# EAGLE board The Extender PCB (EAGLE 9.5.0)
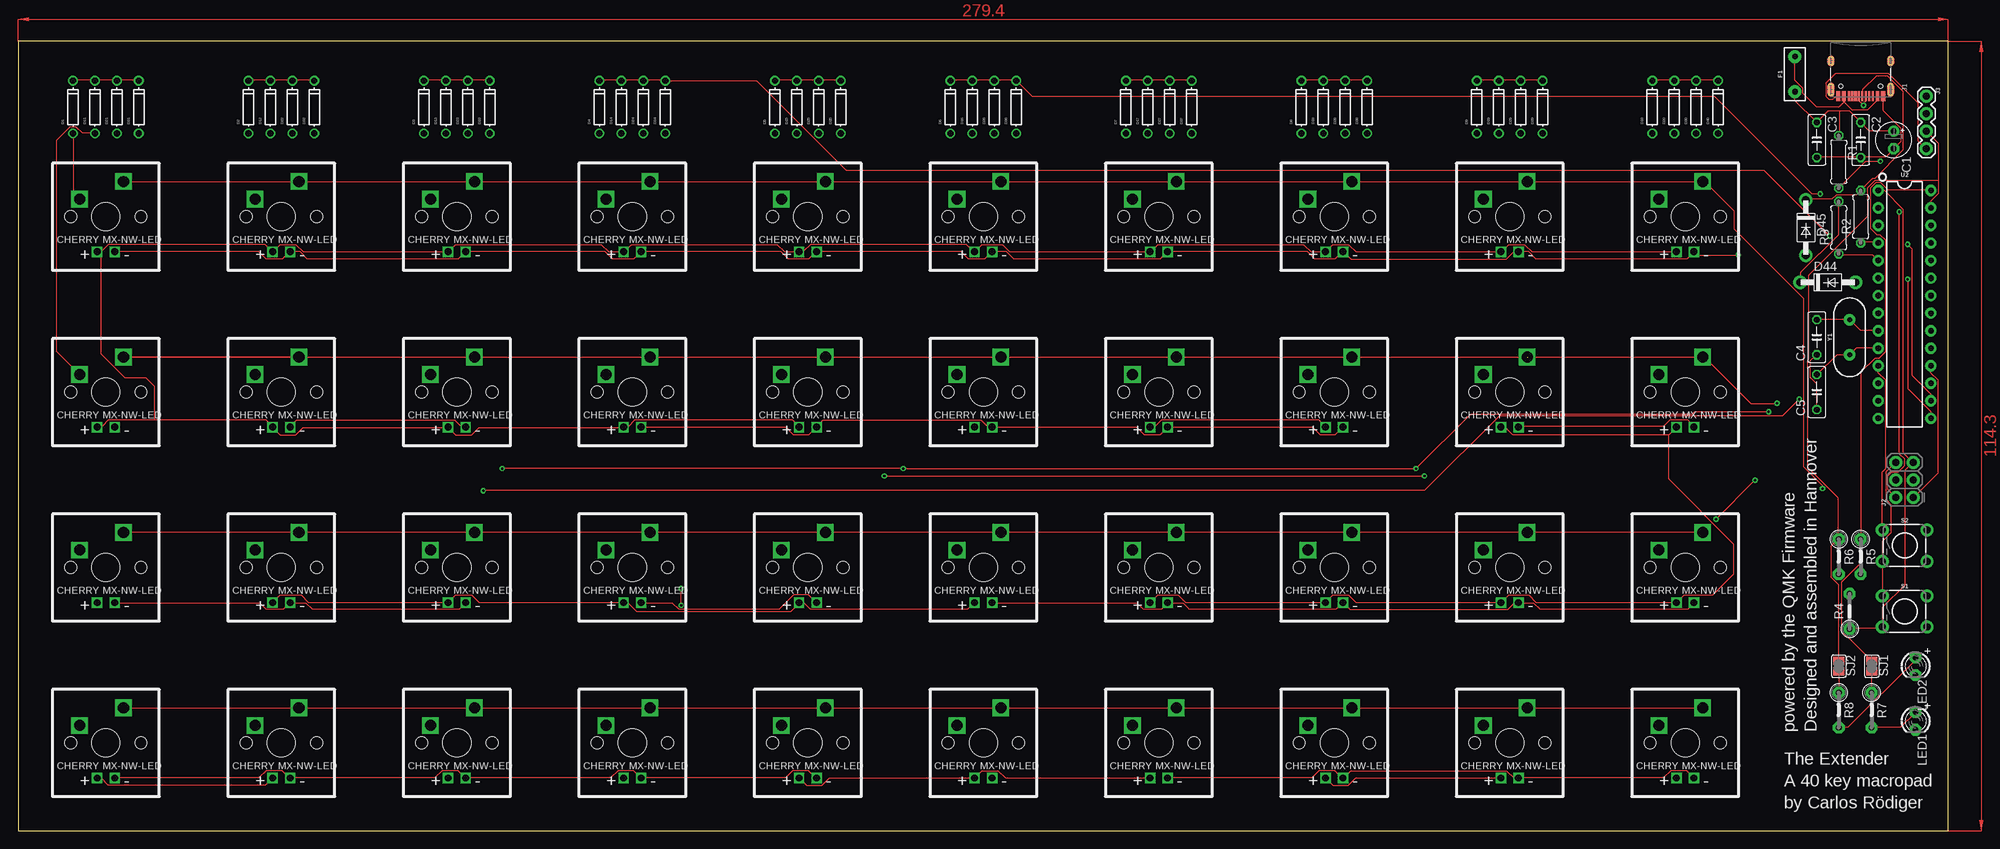
[diagram p0: board, top side]
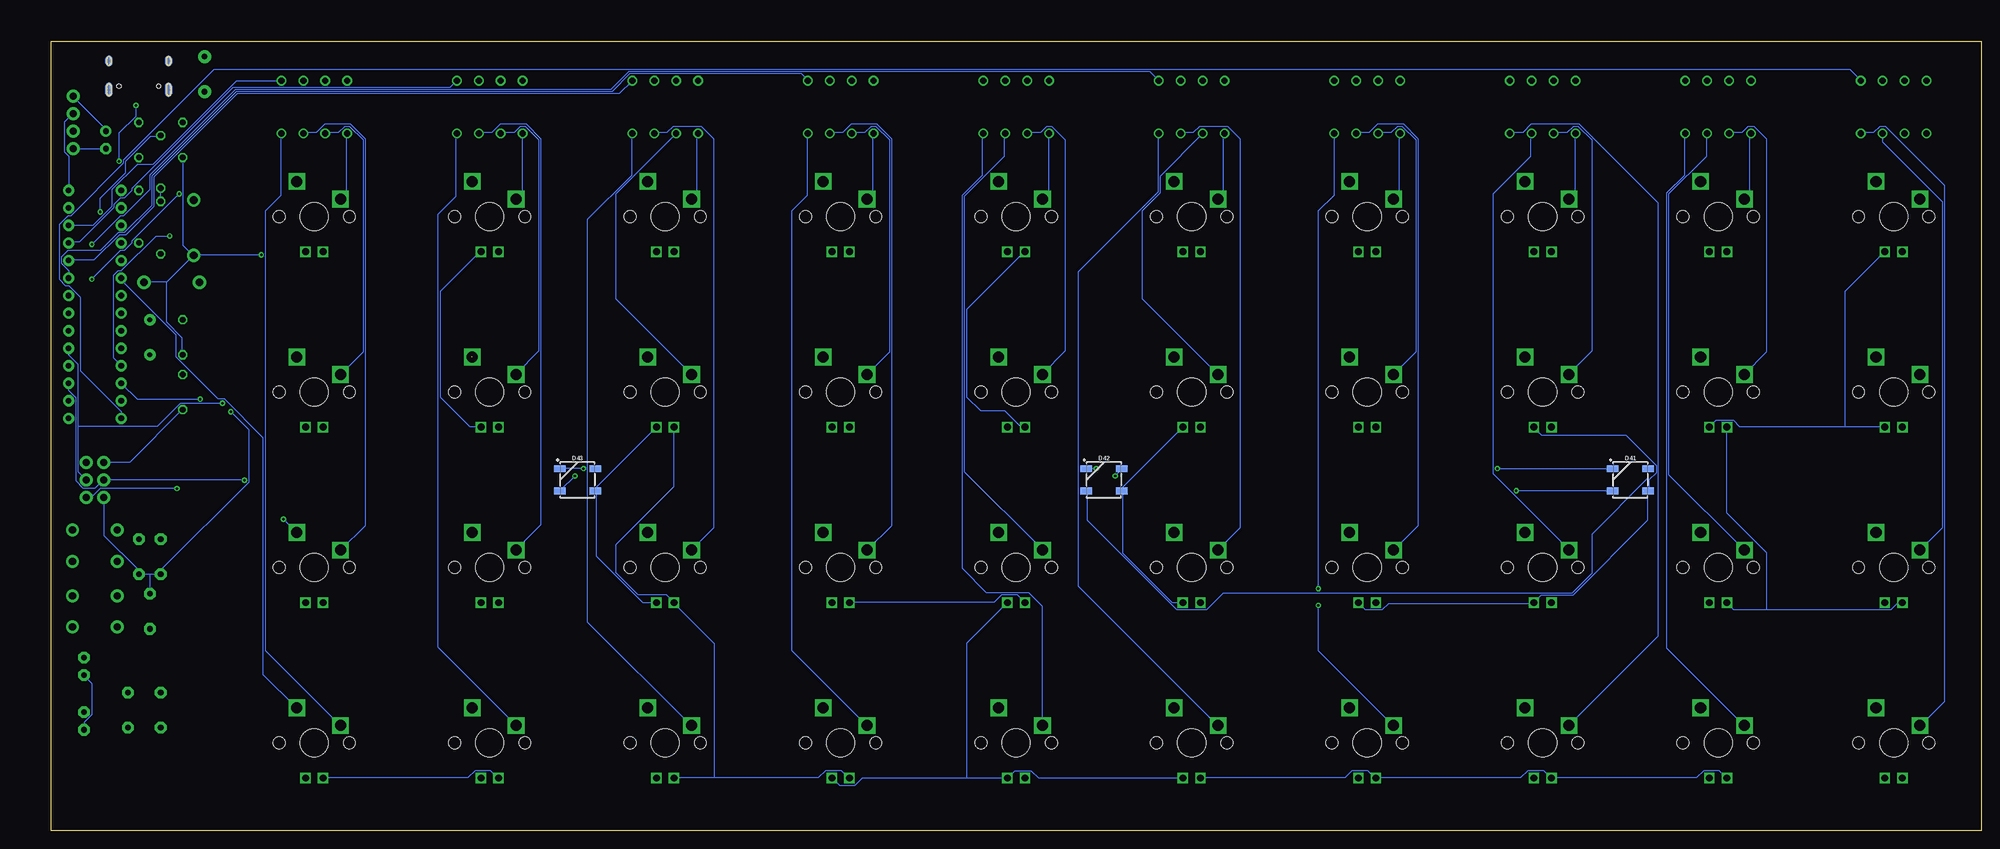
[diagram p1: board, bottom side, seen from below]

Size 279.4 x 114.3 mm. Coordinates in mm from the lower left corner, seen from the top.
Outline: 0,0 279.4,0 279.4,114.3 0,114.3 0,0
Copper layers (1*16): Top 0.035mm / dielectric 1.5mm / Bottom 0.035mm
Design rules "default": minimum track width 6mil, minimum drill 0.35mm, track to track 6mil, track to pad 6mil, pad to pad 6mil, via to via 6mil, smd to smd 6mil, copper to edge 40mil, drill to drill 6mil, minimum pad ring 10mil, minimum via ring 8mil, stop-mask expansion 4mil, vias tented up to drill 0mil, thermal gap 10mil

## Footprints (pad centres in the part's own frame; a part is rotated, then mirrored left to right if it is on the bottom)
E2,5-5 = drill 0.813 pad 1.6: + -1.27,0 | drill 0.813 pad 1.6 octagon: - 1.27,0
C050-025X075 = drill 0.813 octagon: 1 -2.54,0; 2 2.54,0
DO-1N4148 = drill 0.9: A -3.81,0; C 3.81,0
WS2812B = smd 1.651 x 1: 1 2.577,-1.6; 2 2.577,1.6; 3 -2.577,1.6; 4 -2.577,-1.6
DO41-7 = drill 1.118 pad 1.93: A 4,0; C -4,0
PTH = drill 0.8 pad 1.88: P$1 -2.54,0; P$2 2.54,0
USB-C-16P = smd 0.3 x 1.45: A5 -1.25,0; A6 -0.25,0; A7 0.25,0; A8 1.25,0; B5 1.75,0; B6 0.75,0; B7 -0.75,0; B8 -1.75,0 | smd 0.6 x 1.45: GND -3.225,0; GND2 3.225,0 | smd 1 x 2.1: SHLD1 -4.32,-0.915; SHLD2 4.32,-0.915 | smd 1 x 2.1 bottom: SHLD3 -4.32,-0.915; SHLD4 4.32,-0.915 | smd 1 x 1.6: SHLD5 -4.32,-5.095; SHLD8 4.32,-5.095 | smd 1 x 1.6 bottom: SHLD6 -4.32,-5.095; SHLD7 4.32,-5.095 | smd 0.55 x 1.45: VBUS1 -2.45,0; VBUS2 2.45,0 | hole 0.65: -2.89,-1.445; 2.89,-1.445
2X3-NS = drill 1.016 pad 1.88: 1 -2.54,-1.27; 2 -2.54,1.27; 3 0,-1.27; 4 0,1.27; 5 2.54,-1.27; 6 2.54,1.27
1X04 = drill 1.016 pad 1.88: 1 0,0; 2 2.54,0; 3 5.08,0; 4 7.62,0
LED3MM = drill 0.813 pad 1.676 octagon: A -1.27,0; K 1.27,0
0207/7 = drill 0.813 octagon: 1 -3.81,0; 2 3.81,0
0207/5V = drill 0.813 pad 1.676 octagon: 1 -2.54,0; 2 2.54,0
TACTILE_SWITCH_PTH_6.0MM = drill 1.016 pad 1.88: 1 -3.251,2.261; 2 3.251,2.261; 3 -3.251,-2.261; 4 3.251,-2.261
SJ = smd 1.168 x 1.6: 1 -0.762,0; 2 0.762,0
DIP28 = drill 0.813 pad 1.626: 1 -16.51,-3.81; 2 -13.97,-3.81; 3 -11.43,-3.81; 4 -8.89,-3.81; 5 -6.35,-3.81; 6 -3.81,-3.81; 7 -1.27,-3.81; 8 1.27,-3.81; 9 3.81,-3.81; 10 6.35,-3.81; 11 8.89,-3.81; 12 11.43,-3.81; 13 13.97,-3.81; 14 16.51,-3.81; 15 16.51,3.81; 16 13.97,3.81; 17 11.43,3.81; 18 8.89,3.81; 19 6.35,3.81; 20 3.81,3.81; 21 1.27,3.81; 22 -1.27,3.81; 23 -3.81,3.81; 24 -6.35,3.81; 25 -8.89,3.81; 26 -11.43,3.81; 27 -13.97,3.81; 28 -16.51,3.81
CHERRYMX-NN-LED = drill 1 square: LED+ -1.27,-5.08; LED- 1.27,-5.08 | drill 1.6 square: SIDE -3.81,2.54; UP 2.54,5.08 | hole 1.753: -5.08,0; 5.08,0 | hole 4.089: 0,0
HC49US = drill 0.7 pad 1.651: 1 -2.54,0; 2 2.54,0

## Placement (x,y rotation side)
C1  4.7u  [E2,5-5]  271.46,100.01 270 top
C2  100n  [C050-025X075]  266.7,100.01 270 top
C3  100n  [C050-025X075]  260.35,100.01 270 top
C4  20p  [C050-025X075]  260.35,71.44 90 top
C5  20p  [C050-025X075]  260.35,63.5 90 top
D1  [DO-1N4148]  7.94,104.78 90 top
D2  [DO-1N4148]  33.34,104.78 90 top
D3  [DO-1N4148]  58.74,104.78 90 top
D4  [DO-1N4148]  84.14,104.78 90 top
D5  [DO-1N4148]  109.54,104.78 90 top
D6  [DO-1N4148]  134.94,104.78 90 top
D7  [DO-1N4148]  160.34,104.78 90 top
D8  [DO-1N4148]  185.74,104.78 90 top
D9  [DO-1N4148]  211.14,104.78 90 top
D10  [DO-1N4148]  236.54,104.78 90 top
D11  [DO-1N4148]  11.11,104.78 90 top
D12  [DO-1N4148]  36.51,104.78 90 top
D13  [DO-1N4148]  61.91,104.78 90 top
D14  [DO-1N4148]  87.31,104.78 90 top
D15  [DO-1N4148]  112.71,104.78 90 top
D16  [DO-1N4148]  138.11,104.78 90 top
D17  [DO-1N4148]  163.51,104.78 90 top
D18  [DO-1N4148]  188.91,104.78 90 top
D19  [DO-1N4148]  214.31,104.78 90 top
D20  [DO-1N4148]  239.71,104.78 90 top
D21  [DO-1N4148]  14.29,104.78 90 top
D22  [DO-1N4148]  39.69,104.78 90 top
D23  [DO-1N4148]  65.09,104.78 90 top
D24  [DO-1N4148]  90.49,104.78 90 top
D25  [DO-1N4148]  115.89,104.78 90 top
D26  [DO-1N4148]  141.29,104.78 90 top
D27  [DO-1N4148]  166.69,104.78 90 top
D28  [DO-1N4148]  192.09,104.78 90 top
D29  [DO-1N4148]  217.49,104.78 90 top
D30  [DO-1N4148]  242.89,104.78 90 top
D31  [DO-1N4148]  17.46,104.78 90 top
D32  [DO-1N4148]  42.86,104.78 90 top
D33  [DO-1N4148]  68.26,104.78 90 top
D34  [DO-1N4148]  93.66,104.78 90 top
D35  [DO-1N4148]  119.06,104.78 90 top
D36  [DO-1N4148]  144.46,104.78 90 top
D37  [DO-1N4148]  169.86,104.78 90 top
D38  [DO-1N4148]  195.26,104.78 90 top
D39  [DO-1N4148]  220.66,104.78 90 top
D40  [DO-1N4148]  246.06,104.78 90 top
D41  WS2812B  [WS2812B]  50.8,50.8 0 bottom
D42  WS2812B  [WS2812B]  127,50.8 0 bottom
D43  WS2812B  [WS2812B]  203.2,50.8 0 bottom
D44  3.6V  [DO41-7]  261.94,79.38 0 top
D45  3.6V  [DO41-7]  258.76,87.31 270 top
F1  72V/0.25A  [PTH]  257.18,109.54 90 top
J1  [USB-C-16P]  266.7,106.36 180 top
J2  AVR_SPI_PROG_3X2NS  [2X3-NS]  273.05,50.8 90 top
J3  [1X04]  276.23,106.36 270 top
LED1  [LED3MM]  274.64,15.88 270 top
LED2  [LED3MM]  274.64,23.81 270 top
R1  1.5k  [0207/7]  263.52,96.84 270 top
R2  75R  [0207/7]  266.7,88.9 90 top
R3  75R  [0207/7]  263.52,87.31 90 top
R4  10k  [0207/5V]  265.11,31.75 90 top
R5  I2C  [0207/5V]  266.7,39.69 270 top
R6  I2C  [0207/5V]  263.52,39.69 270 top
R7  [0207/5V]  268.29,17.46 270 top
R8  [0207/5V]  263.52,17.46 270 top
S1  MOMENTARY-SWITCH-SPST-PTH-6.0MM  [TACTILE_SWITCH_PTH_6.0MM]  273.05,31.75 0 top
S2  MOMENTARY-SWITCH-SPST-PTH-6.0MM  [TACTILE_SWITCH_PTH_6.0MM]  273.05,41.27 0 top
SJ1  [SJ]  268.29,23.81 270 top
SJ2  [SJ]  263.52,23.81 270 top
U2  328P  [DIP28]  273.05,76.2 270 top
U$1  CHERRY-MX1A-E1NW-LED  [CHERRYMX-NN-LED]  12.7,88.9 0 top
U$2  CHERRY-MX1A-E1NW-LED  [CHERRYMX-NN-LED]  38.1,88.9 0 top
U$3  CHERRY-MX1A-E1NW-LED  [CHERRYMX-NN-LED]  63.5,88.9 0 top
U$4  CHERRY-MX1A-E1NW-LED  [CHERRYMX-NN-LED]  88.9,88.9 0 top
U$5  CHERRY-MX1A-E1NW-LED  [CHERRYMX-NN-LED]  114.3,88.9 0 top
U$6  CHERRY-MX1A-E1NW-LED  [CHERRYMX-NN-LED]  139.7,88.9 0 top
U$7  CHERRY-MX1A-E1NW-LED  [CHERRYMX-NN-LED]  165.1,88.9 0 top
U$8  CHERRY-MX1A-E1NW-LED  [CHERRYMX-NN-LED]  190.5,88.9 0 top
U$9  CHERRY-MX1A-E1NW-LED  [CHERRYMX-NN-LED]  215.9,88.9 0 top
U$10  CHERRY-MX1A-E1NW-LED  [CHERRYMX-NN-LED]  241.3,88.9 0 top
U$11  CHERRY-MX1A-E1NW-LED  [CHERRYMX-NN-LED]  12.7,63.5 0 top
U$12  CHERRY-MX1A-E1NW-LED  [CHERRYMX-NN-LED]  38.1,63.5 0 top
U$13  CHERRY-MX1A-E1NW-LED  [CHERRYMX-NN-LED]  63.5,63.5 0 top
U$14  CHERRY-MX1A-E1NW-LED  [CHERRYMX-NN-LED]  88.9,63.5 0 top
U$15  CHERRY-MX1A-E1NW-LED  [CHERRYMX-NN-LED]  114.3,63.5 0 top
U$16  CHERRY-MX1A-E1NW-LED  [CHERRYMX-NN-LED]  139.7,63.5 0 top
U$17  CHERRY-MX1A-E1NW-LED  [CHERRYMX-NN-LED]  165.1,63.5 0 top
U$18  CHERRY-MX1A-E1NW-LED  [CHERRYMX-NN-LED]  190.5,63.5 0 top
U$19  CHERRY-MX1A-E1NW-LED  [CHERRYMX-NN-LED]  215.9,63.5 0 top
U$20  CHERRY-MX1A-E1NW-LED  [CHERRYMX-NN-LED]  241.3,63.5 0 top
U$21  CHERRY-MX1A-E1NW-LED  [CHERRYMX-NN-LED]  12.7,38.1 0 top
U$22  CHERRY-MX1A-E1NW-LED  [CHERRYMX-NN-LED]  38.1,38.1 0 top
U$23  CHERRY-MX1A-E1NW-LED  [CHERRYMX-NN-LED]  63.5,38.1 0 top
U$24  CHERRY-MX1A-E1NW-LED  [CHERRYMX-NN-LED]  88.9,38.1 0 top
U$25  CHERRY-MX1A-E1NW-LED  [CHERRYMX-NN-LED]  114.3,38.1 0 top
U$26  CHERRY-MX1A-E1NW-LED  [CHERRYMX-NN-LED]  139.7,38.1 0 top
U$27  CHERRY-MX1A-E1NW-LED  [CHERRYMX-NN-LED]  165.1,38.1 0 top
U$28  CHERRY-MX1A-E1NW-LED  [CHERRYMX-NN-LED]  190.5,38.1 0 top
U$29  CHERRY-MX1A-E1NW-LED  [CHERRYMX-NN-LED]  215.9,38.1 0 top
U$30  CHERRY-MX1A-E1NW-LED  [CHERRYMX-NN-LED]  241.3,38.1 0 top
U$31  CHERRY-MX1A-E1NW-LED  [CHERRYMX-NN-LED]  12.7,12.7 0 top
U$32  CHERRY-MX1A-E1NW-LED  [CHERRYMX-NN-LED]  38.1,12.7 0 top
U$33  CHERRY-MX1A-E1NW-LED  [CHERRYMX-NN-LED]  63.5,12.7 0 top
U$34  CHERRY-MX1A-E1NW-LED  [CHERRYMX-NN-LED]  88.9,12.7 0 top
U$35  CHERRY-MX1A-E1NW-LED  [CHERRYMX-NN-LED]  114.3,12.7 0 top
U$36  CHERRY-MX1A-E1NW-LED  [CHERRYMX-NN-LED]  139.7,12.7 0 top
U$37  CHERRY-MX1A-E1NW-LED  [CHERRYMX-NN-LED]  165.1,12.7 0 top
U$38  CHERRY-MX1A-E1NW-LED  [CHERRYMX-NN-LED]  190.5,12.7 0 top
U$39  CHERRY-MX1A-E1NW-LED  [CHERRYMX-NN-LED]  215.9,12.7 0 top
U$40  CHERRY-MX1A-E1NW-LED  [CHERRYMX-NN-LED]  241.3,12.7 0 top
Y1  16MHz  [HC49US]  265.11,71.44 90 top

## Library data of the parts
C1-C5 D1-D40 D44 D45 LED1 LED2 R1-R8 = adafruit
D41-D43 = SparkFun-LED; PROD_ID: DIO-12503
F1 = SparkFun-Fuses; PROD_ID: RES-08490
J1 = SparkFun-Connectors; PROD_ID: CONN-14122
J2 = SparkFun-Connectors
J3 = SparkFun-Connectors; PROD_ID: CONN-09696
S1 S2 = SparkFun-Switches; PROD_ID: SWCH-08441; SF_SKU: COM-00097
SJ1 SJ2 = jumper
U2 = SparkFun-IC-Microcontroller; PROD_ID: IC-09136
U$1-U$40 = my_parts
Y1 = SparkFun-Clocks; PROD_ID: XTAL-08181; SF_ID: COM-00536

## Nets
5V: C1.+ C2.1 C3.1 D41.3 D42.3 D43.3 F1.P$1 J2.2 J3.1 R1.1 R4.2 R5.2 R6.2
COLUMN0: D1.C D11.C D21.C D31.C U2.14
COLUMN1: D2.C D12.C D22.C D32.C
COLUMN2: D3.C D13.C D23.C D33.C
COLUMN3: D4.C D14.C D24.C D34.C S2.1 U2.11
COLUMN4: D5.C D15.C D25.C D35.C U2.16
COLUMN5: D6.C D16.C D26.C D36.C U2.15
COLUMN6: D7.C D17.C D27.C D37.C U2.23
COLUMN7: D8.C D18.C D28.C D38.C U2.24
COLUMN8: D9.C D19.C D29.C D39.C U2.25
COLUMN9: D10.C D20.C D30.C D40.C U2.26
GND: C1.- C2.2 C3.2 C4.1 C5.1 D41.1 D42.1 D43.1 D44.A D45.A J1.GND J1.GND2 J2.6 J3.4 S1.1 S2.3 U$1.LED- U$2.LED- U$3.LED- U$4.LED- U$5.LED- U$6.LED- U$7.LED- U$8.LED- U$9.LED- U$10.LED- U$11.LED- U$12.LED- U$13.LED- U$14.LED- U$15.LED- U$16.LED- U$17.LED- U$18.LED- U$19.LED- U$20.LED- U$21.LED- U$22.LED- U$23.LED- U$24.LED- U$25.LED- U$26.LED- U$27.LED- U$28.LED- U$29.LED- U$30.LED- U$31.LED- U$32.LED- U$33.LED- U$34.LED- U$35.LED- U$36.LED- U$37.LED- U$38.LED- U$39.LED- U$40.LED-
I2C_SCL: J3.2 R5.1 SJ1.1 U2.28
I2C_SDA: J3.3 R6.1 SJ2.1 U2.27
LED+: U$1.LED+ U$2.LED+ U$3.LED+ U$4.LED+ U$5.LED+ U$6.LED+ U$7.LED+ U$8.LED+ U$9.LED+ U$10.LED+ U$11.LED+ U$12.LED+ U$13.LED+ U$14.LED+ U$15.LED+ U$16.LED+ U$17.LED+ U$18.LED+ U$19.LED+ U$20.LED+ U$21.LED+ U$22.LED+ U$23.LED+ U$24.LED+ U$25.LED+ U$26.LED+ U$27.LED+ U$28.LED+ U$29.LED+ U$30.LED+ U$31.LED+ U$32.LED+ U$33.LED+ U$34.LED+ U$35.LED+ U$36.LED+ U$37.LED+ U$38.LED+ U$39.LED+ U$40.LED+
N$1: D1.A U$1.SIDE
N$2: D2.A U$2.SIDE
N$3: D3.A U$3.SIDE
N$4: D4.A U$4.SIDE
N$5: D5.A U$5.SIDE
N$6: D6.A U$6.SIDE
N$7: D7.A U$7.SIDE
N$8: D8.A U$8.SIDE
N$9: D9.A U$9.SIDE
N$10: D10.A U$10.SIDE
N$11: D11.A U$11.SIDE
N$12: D12.A U$12.SIDE
N$13: D13.A U$13.SIDE
N$14: D14.A U$14.SIDE
N$15: D15.A U$15.SIDE
N$16: D16.A U$16.SIDE
N$17: D17.A U$17.SIDE
N$18: D18.A U$18.SIDE
N$19: D19.A U$19.SIDE
N$20: D20.A U$20.SIDE
N$21: D21.A U$21.SIDE
N$22: D22.A U$22.SIDE
N$23: D23.A U$23.SIDE
N$24: D24.A U$24.SIDE
N$25: D25.A U$25.SIDE
N$26: D26.A U$26.SIDE
N$27: D27.A U$27.SIDE
N$28: D28.A U$28.SIDE
N$29: D29.A U$29.SIDE
N$30: D30.A U$30.SIDE
N$31: D31.A U$31.SIDE
N$32: D32.A U$32.SIDE
N$33: D33.A U$33.SIDE
N$34: D34.A U$34.SIDE
N$35: D35.A U$35.SIDE
N$36: D36.A U$36.SIDE
N$37: D37.A U$37.SIDE
N$38: D38.A U$38.SIDE
N$39: D39.A U$39.SIDE
N$40: D40.A U$40.SIDE
N$41: D41.2 D42.4
N$42: D42.2 D43.4
N$43: F1.P$2 J1.VBUS1 J1.VBUS2
N$44: D44.C J1.A7 J1.B7 R1.2 R3.2
N$45: U2.2
N$46: D45.C J1.A6 J1.B6 R2.2
N$47: C5.2 U2.10 Y1.1
N$48: C4.2 U2.9 Y1.2
N$49: R7.1 SJ1.2
N$50: U2.3
N$51: LED1.A R7.2
N$52: R8.1 SJ2.2
N$53: LED2.A R8.2
RESET: J2.5 R4.1 S1.3 U2.1
RGB: LED1.K LED2.K
RGB_DATA: D41.4 U2.12
ROW0: J2.1 U2.18 U$1.UP U$2.UP U$3.UP U$4.UP U$5.UP U$6.UP U$7.UP U$8.UP U$9.UP U$10.UP
ROW1: J2.3 U2.19 U$11.UP U$12.UP U$13.UP U$14.UP U$15.UP U$16.UP U$17.UP U$18.UP U$19.UP U$20.UP
ROW2: J2.4 U2.17 U$21.UP U$22.UP U$23.UP U$24.UP U$25.UP U$26.UP U$27.UP U$28.UP U$29.UP U$30.UP
ROW3: U2.6 U$31.UP U$32.UP U$33.UP U$34.UP U$35.UP U$36.UP U$37.UP U$38.UP U$39.UP U$40.UP
USB_D+: R2.1 U2.4
USB_D-: R3.1 U2.5

## Tracks (layer width: path | path; a pad name or v marks a point on that pad's centre or on a via)
5V  (via drill 0.35)
  Top 0.152: C1.+ 267.97,101.28 C2.1 265.11,104.14 263.6,104.14 | 263.6,104.14 261.94,104.14 C3.1 257.18,105.73 F1.P$1 | 263.6,104.14 263.6,100.74 R1.1 | v272.29,89.61 272.29,54.56 273.05,53.8 273.05,52.88 272.14,51.97 271.22,51.97 270.61,51.36 270.61,49.38 271.68,48.31 J2.2 | v70.05,52.43 v128.12,52.43 v202.34,52.43 210.26,60.35 242.42,60.35 242.72,60.65 v253.39,60.65
  Bottom 0.152: C1.+ 271.53,101.35 271.53,101.65 276.1,106.22 J3.1 | 265.12,37.19 266.65,37.19 R5.2 266.8,37.19 266.8,37.79 271.68,42.67 271.68,48.16 J2.2 | 265.12,37.19 263.6,37.19 R6.2 263.45,37.19 263.45,37.79 250.8,50.44 250.8,58.06 v253.39,60.65 | 265.12,37.19 265.12,34.29 R4.2 | v272.29,89.61 272.29,91.59 268.63,95.25 268.63,96.93 264.97,100.58 263.6,100.58 R1.1 | v70.05,52.43 53.44,52.43 D41.3 | v128.12,52.43 129.49,52.43 D42.3 | v202.34,52.43 205.69,52.43 D43.3
COLUMN0
  Top 0.152: D1.C 8.03,108.66 11.07,108.66 D11.C 11.23,108.66 14.28,108.66 D21.C 14.43,108.66 17.32,108.66 D31.C
  Bottom 0.152: U2.14 269.24,60.65 275.18,66.6 275.18,77.27 276.86,78.94 277.32,78.94 278.23,79.86 278.23,87.78 277.01,89 276.56,89 268.94,96.62 268.94,97.08 255.83,110.19 19,110.19 17.47,108.66 D31.C
COLUMN1
  Top 0.152: D2.C 33.48,108.66 36.37,108.66 D12.C 36.53,108.66 39.57,108.66 D22.C 39.73,108.66 42.77,108.66 D32.C
COLUMN2
  Top 0.152: D3.C 58.78,108.66 61.82,108.66 D13.C 61.98,108.66 65.02,108.66 D23.C 65.18,108.66 68.22,108.66 D33.C
COLUMN3  (via drill 0.35)
  Top 0.152: D4.C 84.23,108.66 87.27,108.66 D14.C 87.43,108.66 90.48,108.66 D24.C 90.63,108.66 93.52,108.66 D34.C 93.68,108.51 106.93,108.51 119.89,95.56 252.78,95.56 v262.23,86.11 | U2.11 269.24,66.29 270.31,65.23 270.31,52.43 269.85,51.97 269.85,43.59 S2.1
  Bottom 0.152: v262.23,86.11 264.21,86.11 269.24,81.08 269.7,81.08 270.31,80.47 270.31,68.43 269.24,67.36 U2.11
COLUMN4  (via drill 0.35)
  Top 0.152: D5.C 109.68,108.66 112.57,108.66 D15.C 112.73,108.66 115.77,108.66 D25.C 115.93,108.66 118.97,108.66 D35.C | U2.16 276.86,63.25 274.12,65.99 274.12,84.28 v273.51,84.89
  Bottom 0.152: v273.51,84.89 269.39,89 268.94,89 265.12,92.81 265.12,94.94 252.78,107.29 198.37,107.29 195.78,109.88 120.34,109.88 119.13,108.66 D35.C
COLUMN5  (via drill 0.35)
  Top 0.152: D6.C 134.98,108.66 138.02,108.66 D16.C 138.18,108.66 141.22,108.66 D26.C 141.38,108.66 144.42,108.66 D36.C 144.58,108.51 146.76,106.32 245.52,106.32 259.64,92.2 v260.86,92.2 | U2.15 276.86,60.65 273.51,64.01 v273.51,79.86
  Bottom 0.152: v273.51,79.86 269.39,83.97 268.78,83.97 267.72,85.04 267.72,85.34 v260.86,92.2
COLUMN6
  Top 0.152: D7.C 160.43,108.66 163.47,108.66 D17.C 163.63,108.66 166.68,108.66 D27.C 166.83,108.66 169.72,108.66 D37.C
  Bottom 0.152: U2.23 276.86,81.08 277.93,82.14 277.93,83.06 277.01,83.97 272.29,83.97 269.7,86.56 268.78,86.56 264.82,90.53 264.82,94.79 252.63,106.99 198.22,106.99 195.63,109.58 170.79,109.58 169.88,108.66 D37.C
COLUMN7
  Top 0.152: D8.C 185.88,108.66 188.77,108.66 D18.C 188.93,108.66 191.97,108.66 D28.C 192.13,108.66 195.17,108.66 D38.C
  Bottom 0.152: U2.24 276.86,82.6 273.2,82.6 269.55,86.26 268.63,86.26 264.52,90.37 264.52,94.64 252.48,106.68 197.16,106.68 195.33,108.51 D38.C
COLUMN8
  Top 0.152: D9.C 211.18,108.66 214.22,108.66 D19.C 214.38,108.66 217.42,108.66 D29.C 217.58,108.66 220.62,108.66 D39.C
  Bottom 0.152: U2.25 276.86,85.19 275.34,85.19 270.31,90.22 270.31,90.68 269.39,91.59 268.78,91.59 267.72,92.66 267.72,92.96 253.09,107.59 221.69,107.59 220.78,108.51 D39.C
COLUMN9
  Top 0.152: D10.C 236.63,108.66 239.67,108.66 D20.C 239.83,108.66 242.88,108.66 D30.C 243.03,108.66 245.92,108.66 D40.C
  Bottom 0.152: U2.26 273.36,87.63 270.61,90.37 270.61,92.81 266.95,96.47 264.67,96.47 252.63,108.51 246.08,108.51 D40.C
GND  (via drill 0.35)
  Top 0.152: U$31.LED- 34.85,7.62 35.92,8.69 38.2,8.69 39.27,7.62 U$32.LED- 60.3,7.62 61.37,8.69 63.65,8.69 64.72,7.62 U$33.LED- 85.75,7.62 86.82,8.69 89.1,8.69 U$34.LED- 111.05,7.62 112.12,8.69 114.4,8.69 115.47,7.62 U$35.LED- | U$40.LED- 241.5,8.69 239.22,8.69 238.15,7.62 U$39.LED- 216.51,7.62 215.44,8.69 192.89,8.69 191.82,7.62 U$38.LED- 191.67,7.62 190.6,8.69 188.32,8.69 187.25,7.62 U$37.LED- | U$13.LED- 64.72,58.52 64.11,58.52 63.19,59.44 40.34,59.44 39.42,58.52 U$12.LED- | U$21.LED- 13.97,32.92 35,32.92 35.92,32 38.35,32 U$22.LED- 39.42,32.92 41.71,32.92 42.62,32 63.81,32 64.72,32.92 U$23.LED- | U$14.LED- 90.17,58.37 111.2,58.37 112.27,57.3 114.4,57.3 115.47,58.37 U$15.LED- 115.62,58.52 116.54,59.44 139.4,59.44 140.31,58.52 140.92,58.52 U$16.LED- 141.07,58.37 161.95,58.37 163.02,57.3 165.3,57.3 166.37,58.37 | U$30.LED- 242.57,32.92 241.66,32 220.32,32 219.41,32.92 217.27,32.92 U$29.LED- 217.12,32.92 216.51,32.92 215.59,32 192.74,32 191.82,32.92 U$28.LED- 190.75,32 169.57,32 168.66,32.92 166.37,32.92 | 166.37,32.92 165.46,32 162.87,32 161.95,32.92 141.07,32.92 U$26.LED- | 166.37,58.37 187.4,58.37 188.47,57.3 190.6,57.3 191.67,58.37 U$18.LED- | 166.37,32.92 U$27.LED- | 166.37,58.37 U$17.LED- | U$24.LED- 90.17,32.92 94.74,32.92 95.66,32 110.13,32 112.27,34.14 114.4,34.14 115.47,33.07 U$25.LED- | C3.2 260.4,97.54 266.65,97.54 C2.2 266.8,97.54 270.31,97.54 271.37,98.6 C1.- 271.53,98.75 272.59,99.82 272.59,101.65 270,104.24 270,106.22 J1.GND | J1.GND2 263.45,106.22 262.99,106.22 262.69,105.92 262.08,105.92 261.62,106.38 261.62,108.2 262.99,109.58 270.76,109.58 275.03,105.31 275.03,99.82 276.1,98.75 J3.4
  Top 0.152: 269.85,39.01 269.85,34.14 S1.1 | C5.1 260.25,60.96 260.25,64.77 259.33,65.68 259.33,67.97 260.25,68.88 C4.1 | 269.85,39.01 269.85,41.91 271.07,43.13 271.07,47.24 270.31,48.01 270.31,51.97 271.68,53.34 J2.6 | 269.85,39.01 S2.3 | U$1.LED- 34.85,83.82 35.92,82.75 38.2,82.75 39.27,83.82 U$2.LED- 40.79,83.82 41.86,82.75 63.65,82.75 64.72,83.82 U$3.LED- 84.99,83.82 86.06,82.75 89.1,82.75 U$4.LED- 110.44,83.82 111.51,82.75 114.4,82.75 115.47,83.82 U$5.LED- 136.5,83.82 137.57,82.75 139.85,82.75 140.92,83.82 U$6.LED- 143.05,83.82 144.12,82.75 165.3,82.75 U$7.LED- 186.64,83.82 187.71,82.75 190.6,82.75 191.67,83.82 U$8.LED- 191.82,83.82 192.89,82.75 215.44,82.75 216.51,83.82 U$9.LED- 218.64,83.82 219.71,82.75 241.5,82.75 U$10.LED- 243.03,83.36 v248.97,83.36 | U$19.LED- 217.27,58.52 238.15,58.52 239.06,59.44 241.66,59.44 242.57,58.52 U$20.LED-
  Bottom 0.152: U$35.LED- 136.5,7.62 137.57,8.69 139.85,8.69 140.92,7.62 U$36.LED- 146.86,7.62 | 146.86,7.62 161.95,7.62 163.02,6.55 165.3,6.55 U$37.LED- | U$13.LED- 63.65,57.3 51.46,57.3 47.04,52.88 47.04,51.82 48.11,50.75 48.11,49.23 D41.1 48.26,49.07 48.26,44.96 59.08,34.14 63.65,34.14 U$23.LED- 64.87,32.92 85.75,32.92 86.66,32 89.26,32 90.17,32.92 U$24.LED- | 19.76,58.52 35,58.52 35.92,59.44 38.35,59.44 U$12.LED- | 19.76,58.52 13.97,58.52 U$11.LED- | U$15.LED- 124.31,49.68 124.31,49.23 D42.1 124.31,49.07 124.31,40.23 117.15,33.07 115.62,33.07 U$25.LED- | U$18.LED- 200.51,49.68 200.51,49.23 D43.1 200.51,49.07 200.51,39.78 193.8,33.07 191.82,33.07 U$28.LED- | 146.86,7.62 146.86,27.13 U$26.LED- | C1.- 271.53,98.75 276.1,98.75 J3.4 | 262.69,79.4 265.89,79.4 D44.A | 262.69,79.4 258.88,83.21 D45.A | J2.6 268.02,53.34 260.4,60.96 C5.1 | 262.69,79.4 262.69,73.61 260.4,71.32 260.4,69.04 C4.1 | C3.2 260.25,97.38 260.25,84.73 258.88,83.36 D45.A | U$19.LED- 217.27,58.52 218.8,58.52 223.06,62.79 223.06,78.03 217.27,83.82 U$9.LED- | v248.97,83.36 258.72,83.36 D45.A | 19.76,58.52 19.76,78.03 U$1.LED-
I2C_SCL
  Top 0.152: SJ1.1 264.82,28.04 264.67,28.04 263.91,28.8 263.91,35.97 266.65,38.71 266.65,42.21 R5.1 266.8,42.37 266.8,66.45 268.78,68.43 269.39,68.43 270.31,69.34 270.31,85.5 269.55,86.26 269.09,86.26 268.17,87.17 268.17,93.12 268.94,93.88 269.55,93.88 270.61,92.81 276.86,92.81 U2.28
  Bottom 0.152: U2.28 276.86,97.69 277.47,98.3 277.47,102.56 276.25,103.78 J3.2
I2C_SDA
  Top 0.152: U2.27 276.86,91.14 277.93,92.2 277.93,94.18 | 277.93,94.18 277.93,99.52 276.25,101.19 J3.3 | SJ2.1 263.45,24.69 263.45,35.66 262.38,36.73 262.38,41.15 263.45,42.21 R6.1 263.45,42.37 263.45,48.16 259.03,52.58 259.03,68.12 259.18,68.28 259.18,80.47 267.72,89 267.72,93.12 268.78,94.18 277.93,94.18
LED+
  Top 0.152: 11.99,83.82 U$1.LED+ 11.53,83.82 | 11.99,83.82 13.06,84.89 35.76,84.89 U$2.LED+ 37.9,84.89 40.18,84.89 41.25,83.82 U$3.LED+ 62.28,83.82 63.35,84.89 84.38,84.89 85.45,83.82 U$4.LED+ 87.73,83.82 88.8,84.89 109.83,84.89 110.9,83.82 U$5.LED+ 113.64,83.82 114.71,84.89 137.26,84.89 138.33,83.82 U$6.LED+ 138.48,83.82 139.55,84.89 142.44,84.89 143.51,83.82 U$7.LED+ 163.93,83.82 165,84.89 186.03,84.89 187.1,83.82 U$8.LED+ 190.3,84.89 192.58,84.89 193.65,83.82 U$9.LED+ 214.68,83.82 215.75,84.89 218.03,84.89 219.1,83.82 U$10.LED+ | U$31.LED+ 11.99,7.62 13.06,6.55 35.76,6.55 U$32.LED+ | U$35.LED+ 114.1,6.55 116.38,6.55 117.45,7.62 U$36.LED+ 138.48,7.62 139.55,8.69 141.83,8.69 142.9,7.62 U$37.LED+ | U$39.LED+ 193.65,7.62 192.58,6.55 190.3,6.55 U$38.LED+ | U$15.LED+ 113.03,58.52 112.12,59.44 89.26,59.44 88.34,58.52 87.73,58.52 U$14.LED+ 87.58,58.37 66.7,58.37 65.63,57.3 63.35,57.3 U$13.LED+ 62.13,58.37 41.25,58.37 40.18,57.3 37.9,57.3 36.83,58.37 U$12.LED+ 36.83,58.52 35.92,59.44 19.76,59.44 | 19.76,59.44 13.06,59.44 12.14,58.52 11.53,58.52 U$11.LED+ | U$22.LED+ 36.83,33.07 37.9,34.14 40.94,34.14 42.01,33.07 62.13,33.07 U$23.LED+ 63.35,34.14 65.63,34.14 66.7,33.07 87.58,33.07 U$24.LED+ 87.73,32.92 88.34,32.92 89.56,31.7 111.81,31.7 113.03,32.92 | 238.91,57.3 216.36,57.3 215.29,58.37 214.68,58.37 U$19.LED+ | U$20.LED+ 238.91,57.3 | U$17.LED+ 163.93,58.52 164.54,58.52 165.46,59.44 188.32,59.44 189.23,58.52 U$18.LED+ | 113.03,32.92 113.79,32.92 114.71,32 137.41,32 U$26.LED+ | 189.23,33.07 168.96,33.07 167.89,34.14 165,34.14 163.93,33.07 U$27.LED+
  Top 0.152: 189.23,33.07 190.3,34.14 192.58,34.14 193.65,33.07 214.53,33.07 U$29.LED+ 215.75,34.14 218.64,34.14 219.71,33.07 239.98,33.07 U$30.LED+ 240.13,33.07 241.2,34.14 245.31,34.14 248.36,37.19 248.36,41.45 238.91,50.9 238.91,57.3 | 189.23,33.07 U$28.LED+ | 113.03,32.92 U$25.LED+ | 11.99,83.82 11.99,69.04 15.49,65.53 18.54,65.53 19.76,64.31 19.76,59.44
  Bottom 0.152: U$16.LED+ 138.48,58.52 139.09,58.52 141.38,60.81 144.88,60.81 146.86,62.79 146.86,75.44 138.48,83.82 U$6.LED+ | U$32.LED+ 37.9,8.69 40.18,8.69 41.25,7.62 U$33.LED+ 62.28,7.62 63.35,8.69 65.63,8.69 66.7,7.62 U$34.LED+ 87.73,7.62 88.8,8.69 91.08,8.69 92.15,7.62 U$35.LED+ | 183.44,7.62 168.35,7.62 167.28,8.69 165,8.69 163.93,7.62 U$37.LED+ | 183.44,7.62 U$38.LED+ | U$40.LED+ 219.1,7.62 218.03,8.69 215.75,8.69 214.68,7.62 U$39.LED+ | 31.04,32 35.92,32 36.83,32.92 U$22.LED+ | 31.04,32 13.06,32 12.14,32.92 11.53,32.92 U$21.LED+ | U$26.LED+ 139.55,34.14 141.83,34.14 142.9,33.07 163.78,33.07 U$27.LED+ | U$18.LED+ 189.23,49.84 197.61,41.45 197.61,37.34 194.41,34.14 190.3,34.14 189.23,33.07 U$28.LED+ 189.23,32.92 183.44,27.13 183.44,7.62 | U$12.LED+ 36.83,46.02 31.04,40.23 31.04,32
N$1
  Top 0.152: D1.A 8.03,100.89 8.03,92.2 8.79,91.44 U$1.SIDE
N$2
  Bottom 0.152: D2.A 33.48,100.89 33.48,92.2 34.24,91.44 U$2.SIDE
N$3
  Bottom 0.152: U$3.SIDE 58.78,92.35 58.78,100.89 D3.A
N$4
  Bottom 0.152: D4.A 84.23,100.89 84.23,92.2 84.99,91.44 U$4.SIDE
N$5
  Bottom 0.152: D5.A 109.68,100.89 109.68,92.2 110.44,91.44 U$5.SIDE
N$6
  Bottom 0.152: U$6.SIDE 134.98,92.35 134.98,100.89 D6.A
N$7
  Bottom 0.152: D7.A 160.43,100.89 160.43,92.2 161.19,91.44 U$7.SIDE
N$8
  Bottom 0.152: D8.A 185.88,100.89 185.88,92.2 186.64,91.44 U$8.SIDE
N$9
  Bottom 0.152: U$9.SIDE 211.18,92.35 211.18,100.89 D9.A
N$10
  Bottom 0.152: D10.A 236.63,100.89 236.63,92.2 237.39,91.44 U$10.SIDE
N$11
  Top 0.152: U$11.SIDE 5.59,69.34 5.59,99.97 7.57,101.96 8.33,101.96 9.25,101.04 11.07,101.04 D11.A
N$12
  Bottom 0.152: D12.A 36.37,101.04 34.7,101.04 33.78,101.96 32.87,101.96 31.04,100.13 31.04,69.34 34.24,66.14 U$12.SIDE
N$13
  Bottom 0.152: D13.A 61.82,101.04 60,101.04 59.08,101.96 58.32,101.96 56.34,99.97 56.34,69.49 59.69,66.14 U$13.SIDE
N$14
  Bottom 0.152: U$14.SIDE 81.79,69.34 81.79,99.97 83.77,101.96 84.53,101.96 85.45,101.04 87.27,101.04 D14.A
N$15
  Bottom 0.152: U$15.SIDE 121.41,76.96 121.41,89.76 118.82,92.35 118.82,94.79 112.73,100.89 D15.A
N$16
  Bottom 0.152: D16.A 138.02,101.04 136.19,101.04 135.28,101.96 134.52,101.96 132.54,99.97 132.54,69.49 135.89,66.14 U$16.SIDE
N$17
  Bottom 0.152: U$17.SIDE 157.99,69.34 157.99,99.97 159.97,101.96 160.73,101.96 161.65,101.04 163.47,101.04 D17.A
N$18
  Bottom 0.152: U$18.SIDE 197.61,76.96 197.61,92.2 188.93,100.89 D18.A
N$19
  Bottom 0.152: D19.A 214.22,101.04 212.4,101.04 211.48,101.96 210.72,101.96 208.74,99.97 208.74,69.49 212.09,66.14 U$19.SIDE
N$20
  Bottom 0.152: U$20.SIDE 234.19,69.34 234.19,99.97 236.17,101.96 236.93,101.96 237.85,101.04 239.67,101.04 D20.A
N$21
  Bottom 0.152: D21.A 14.28,100.89 14.28,99.67 5.59,90.98 5.59,43.89 8.79,40.69 U$21.SIDE
N$22
  Bottom 0.152: D22.A 39.73,100.89 39.73,97.69 45.21,92.2 45.21,51.51 34.39,40.69 U$22.SIDE
N$23
  Bottom 0.152: D23.A 65.18,100.89 65.18,97.69 70.66,92.2 70.66,51.66 59.69,40.69 U$23.SIDE
N$24
  Bottom 0.152: D24.A 90.48,101.04 88.65,101.04 87.43,102.26 83.62,102.26 81.48,100.13 81.48,44.2 84.99,40.69 U$24.SIDE
N$25
  Bottom 0.152: U$25.SIDE 107.24,43.89 107.24,100.13 109.07,101.96 113.18,101.96 114.1,101.04 115.77,101.04 D25.A
N$26
  Bottom 0.152: D26.A 141.38,100.89 141.38,97.69 147.17,91.9 147.17,51.97 135.89,40.69 U$26.SIDE
N$27
  Bottom 0.152: D27.A 166.68,101.04 164.85,101.04 163.63,102.26 159.82,102.26 157.68,100.13 157.68,44.2 161.19,40.69 U$27.SIDE
N$28
  Bottom 0.152: U$28.SIDE 183.44,43.89 183.44,100.13 185.27,101.96 189.38,101.96 190.3,101.04 191.97,101.04 D28.A
N$29
  Bottom 0.152: D29.A 217.42,101.04 215.59,101.04 214.38,102.26 210.57,102.26 208.43,100.13 208.43,44.35 212.09,40.69 U$29.SIDE
N$30
  Bottom 0.152: D30.A 242.88,101.04 241.05,101.04 239.83,102.26 236.02,102.26 233.88,100.13 233.88,44.2 237.39,40.69 U$30.SIDE
N$31
  Bottom 0.152: D31.A 17.32,101.04 15.65,101.04 14.73,101.96 13.82,101.96 5.28,93.42 5.28,18.74 8.79,15.24 U$31.SIDE
N$32
  Bottom 0.152: D32.A 42.93,100.89 42.93,94.94 45.52,92.35 45.52,26.37 34.39,15.24 U$32.SIDE
N$33
  Bottom 0.152: U$33.SIDE 46.74,28.19 46.74,90.83 58.17,102.26 65.18,102.26 66.4,101.04 68.22,101.04 D33.A
N$34  (via drill 0.35)
  Top 0.152: v95.96,32.61 v95.96,35.05
  Bottom 0.152: v95.96,35.05 95.96,89.76 93.68,92.05 93.68,100.89 D34.A | v95.96,32.61 95.96,26.06 85.14,15.24 U$34.SIDE
N$35
  Bottom 0.152: D35.A 119.13,100.89 119.13,92.51 130.71,80.92 130.71,35.36 110.59,15.24 U$35.SIDE
N$36
  Bottom 0.152: U$36.SIDE 135.89,32.46 137.87,34.44 143.97,34.44 147.47,37.95 147.47,92.05 144.58,94.94 144.58,100.89 D36.A
N$37
  Bottom 0.152: D37.A 169.88,100.89 169.88,92.05 172.16,89.76 172.16,26.06 161.34,15.24 U$37.SIDE
N$38
  Bottom 0.152: D38.A 195.33,100.89 195.33,94.94 201.73,88.54 201.73,30.18 186.79,15.24 U$38.SIDE
N$39
  Bottom 0.152: U$39.SIDE 223.37,26.52 223.37,89.31 220.78,91.9 220.78,100.89 D39.A
N$40
  Bottom 0.152: D40.A 246.08,100.89 246.08,92.05 248.36,89.76 248.36,26.06 237.54,15.24 U$40.SIDE
N$41
  Bottom 0.152: D41.2 48.26,52.27 48.26,51.05 56.34,42.98 56.34,37.34 59.23,34.44 109.68,34.44 112.12,32 116.54,32 129.49,44.96 129.49,49.07 D42.4
N$42  (via drill 0.35)
  Top 0.152: v125.37,51.36 v203.56,51.36
  Bottom 0.152: v203.56,51.36 205.69,49.23 D43.4 | v125.37,51.36 124.46,52.27 D42.2
N$43
  Top 0.152: J1.VBUS2 264.25,105.61 | 264.25,105.61 264.25,105.5 263.52,104.78 260.35,104.78 258.34,106.78 258.34,107.48 257.18,108.65 F1.P$2 | J1.VBUS1 269.09,106.22 269.09,105.77 267.72,104.39 265.43,104.39 264.21,105.61 264.25,105.61
N$44  (via drill 0.35)
  Top 0.152: 267.11,105.31 266.8,105.31 266.5,105.61 266.5,106.22 J1.A7 | 267.11,105.31 267.41,105.61 267.41,106.22 J1.B7 | v267.11,105 267.11,105.31 | v269.55,96.93 267.41,96.93 263.6,93.12 R1.2 | D44.C 257.96,79.4 257.96,80.77 263.45,86.26 263.45,90.98 R3.2
  Bottom 0.152: v267.11,105 267.11,103.48 269.55,101.04 v269.55,96.93 | R3.2 263.6,91.14 263.6,92.96 R1.2
N$46
  Top 0.152: J1.A6 266.95,106.38 266.95,107.29 268.94,109.27 270.61,109.27 272.9,106.99 272.9,98.6 268.78,94.49 268.48,94.49 R2.2 266.04,92.05 263.14,92.05 262.53,91.44 258.88,91.44 D45.C
N$47
  Top 0.152: U2.10 266.06,69.85 Y1.1 263.21,68.9 C5.2
N$48
  Top 0.152: U2.9 266.7,72.39 Y1.2 C4.2
N$49
  Top 0.152: SJ1.2 268.33,23.01 268.33,20.12 R7.1
N$51
  Top 0.152: R7.2 268.33,14.93 272.44,14.93 274.57,17.07 LED1.A
N$52
  Top 0.152: SJ2.2 263.6,23.01 263.6,20.12 R8.1
N$53
  Top 0.152: R8.2 263.6,14.93 264.82,14.93 274.57,24.69 274.57,24.99 LED2.A
RESET
  Top 0.152: R4.1 265.12,29.26 269.55,29.26 269.7,29.41 S1.3 269.85,29.57 269.85,32.31 273.05,35.51 273.05,52.12 274.27,53.34 | 274.27,53.34 272.9,54.71 272.9,89.92 270.15,92.66 269.24,92.66 U2.1 | 274.27,53.34 J2.5
RGB
  Bottom 0.152: LED1.K 274.57,14.63 274.57,15.7 273.51,16.76 273.51,21.34 274.57,22.4 LED2.K
RGB_DATA  (via drill 0.35)
  Top 0.152: v67.31,49.23 203.56,49.23 214.38,60.05 255.37,60.05 v257.81,62.48
  Bottom 0.152: v67.31,49.23 53.44,49.23 D41.4 | v257.81,62.48 266.95,62.48 U2.12
ROW0  (via drill 0.35)
  Top 0.152: U$1.UP U$2.UP | U$2.UP U$3.UP | U$3.UP 66.09,93.98 | 66.09,93.98 U$4.UP | U$4.UP 91.54,93.98 | 91.54,93.98 U$5.UP | U$5.UP 142.14,93.98 | 142.14,93.98 U$6.UP | U$6.UP U$7.UP | U$7.UP 167.74,93.98 | 167.74,93.98 U$8.UP | U$8.UP U$9.UP | U$9.UP 218.49,93.98 | 218.49,93.98 U$10.UP 243.94,93.88 244.25,93.88 248.36,89.76 248.36,87.17 258.42,77.11 258.42,52.73 261.16,49.99 v261.16,49.53 | U2.18 276.86,66.29 277.93,65.23 277.93,51.82 274.42,48.31 J2.1 | 40.64,94.03 U$2.UP | 142.14,93.98 142.14,94.03 U$6.UP | U$3.UP 66.09,94.03 66.09,93.98 | U$4.UP 91.54,94.03 91.54,93.98 | 116.84,94.03 U$5.UP | U$7.UP 167.74,94.03 167.74,93.98 | 193.04,94.03 U$8.UP | U$9.UP 218.49,94.03 218.49,93.98
  Bottom 0.152: v261.16,49.53 272.29,49.53 273.51,48.31 274.27,48.31 J2.1
ROW1  (via drill 0.35)  (1 unrouted)
  Top 0.152: U$16.UP U$14.UP U$13.UP U$11.UP U$12.UP | U$16.UP U$17.UP U$19.UP U$20.UP 244.09,68.58 250.8,61.87 v254.61,61.87 | U$18.UP 218.49,68.58 | U$15.UP U$16.UP
  Bottom 0.152: U2.19 276.86,68.88 275.49,67.51 275.49,58.52 | 275.49,58.52 275.49,51.97 J2.3 | 275.49,58.52 264.06,58.52 260.71,61.87 v254.61,61.87
ROW2  (via drill 0.35)
  Top 0.152: U$30.UP 218.49,43.18 | 218.49,43.18 U$29.UP | U$29.UP U$28.UP | U$28.UP 167.74,43.18 | 167.74,43.18 U$27.UP | U$27.UP U$26.UP | U$26.UP 142.14,43.18 | 142.14,43.18 U$25.UP | U$25.UP 91.54,43.18 | 91.54,43.18 U$24.UP | U$24.UP 66.09,43.18 | 66.09,43.18 U$23.UP | U$23.UP U$22.UP | U$22.UP U$21.UP | 40.64,43.13 U$22.UP | 142.14,43.18 142.14,43.13 U$26.UP | U$23.UP 66.09,43.13 66.09,43.18 | U$24.UP 91.54,43.13 91.54,43.18 | 116.84,43.13 U$25.UP | U$27.UP 167.74,43.13 167.74,43.18 | 193.04,43.13 U$28.UP | U$29.UP 218.49,43.13 218.49,43.18 | v245.77,45.11 v251.41,50.75
  Bottom 0.152: U2.17 276.86,63.7 275.79,62.64 275.79,50.6 274.73,49.53 273.05,49.53 J2.4 271.68,50.75 v251.41,50.75 | U$30.UP v245.77,45.11
ROW3
  Top 0.152: U$31.UP U$32.UP | U$32.UP U$33.UP | U$33.UP 66.09,17.78 | 66.09,17.78 U$34.UP | U$34.UP 91.54,17.78 | 91.54,17.78 U$35.UP | U$35.UP U$36.UP | U$36.UP 142.29,17.78 | 142.29,17.78 U$37.UP | U$37.UP 167.74,17.78 | 167.74,17.78 U$38.UP | U$38.UP U$39.UP | U$39.UP 218.49,17.78 | 218.49,17.78 U$40.UP | 40.64,17.83 U$32.UP | U$33.UP 66.09,17.83 66.09,17.78 | U$34.UP 91.54,17.83 91.54,17.78 | 116.84,17.83 U$35.UP | U$36.UP 142.29,17.83 142.29,17.78 | U$37.UP 167.74,17.83 167.74,17.78 | 193.04,17.83 U$38.UP | U$39.UP 218.49,17.83 218.49,17.78
  Bottom 0.152: U2.6 269.24,79.71 261.31,71.78 261.31,68.58 255.22,62.48 254.31,62.48 248.67,56.84 248.67,22.55 243.94,17.83 U$40.UP
USB_D+
  Top 0.152: R2.1 266.8,85.19 269.24,85.19 U2.4
USB_D-
  Top 0.152: R3.1 263.6,83.36 268.48,83.36 269.24,82.6 U2.5
(copper drawn outside any net)
  shapes: Top area x2

## Text on the board
top_silk: powered by the QMK Firmware | Designed and assembled in Hannover | The Extender | A 40 key macropad | by Carlos Rödiger